# EAGLE board Board - Copy (EAGLE 8.4.2)
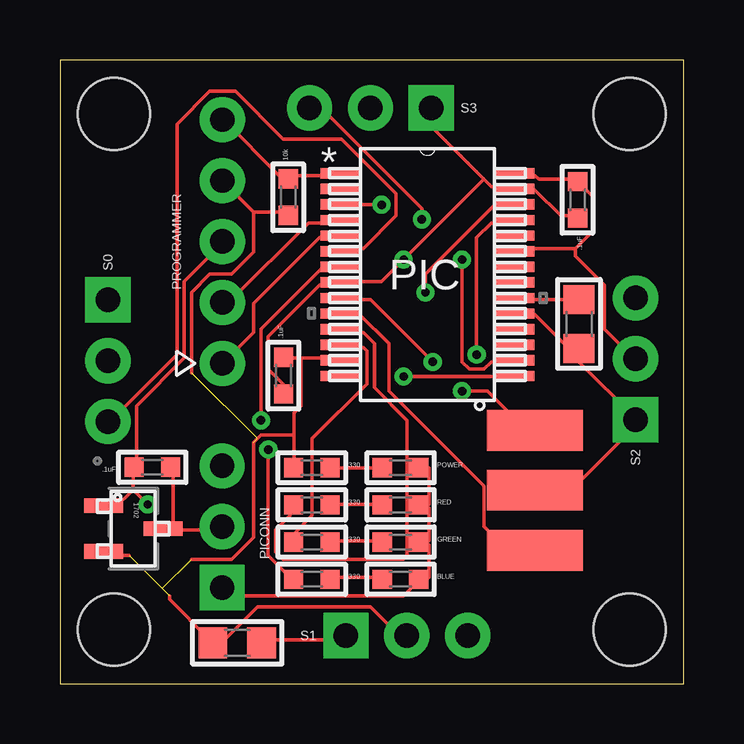
[diagram p0: board, top side]
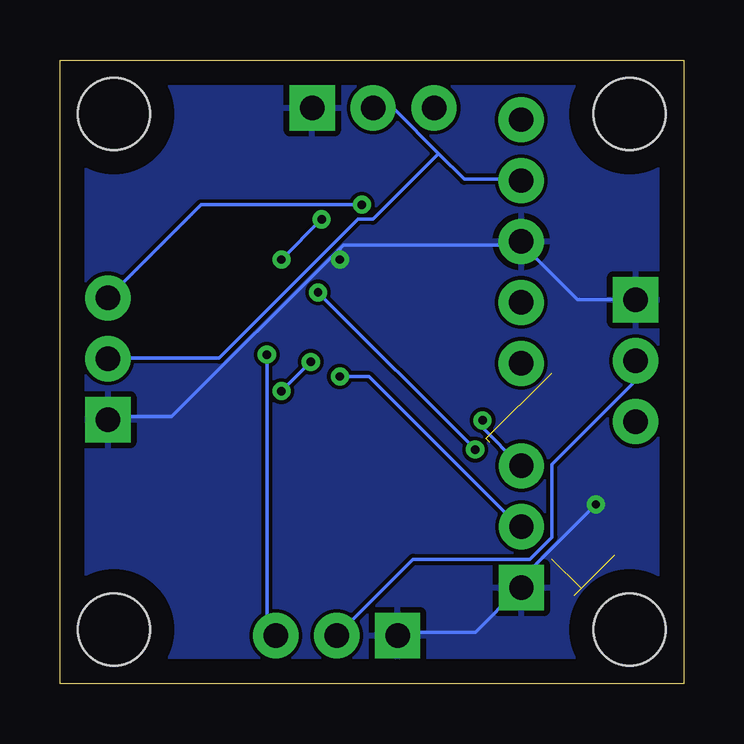
[diagram p1: board, bottom side, seen from below]

Size 26 x 26 mm. Coordinates in mm from the lower left corner, seen from the top.
Outline: 0,0 26,0 26,26 0,26 0,0
Copper layers (1*16): Top 0.035mm / dielectric 1.5mm / Bottom 0.035mm
Design rules "default": minimum track width 6mil, minimum drill 0.35mm, track to track 6mil, track to pad 6mil, pad to pad 6mil, via to via 6mil, smd to smd 6mil, copper to edge 40mil, drill to drill 6mil, minimum pad ring 10mil, minimum via ring 8mil, stop-mask expansion 4mil, vias tented up to drill 0mil, thermal gap 10mil
Holes 3 mm at 2.25,23.75 23.75,23.75 23.75,2.25 2.25,2.25

## Footprints (pad centres in the part's own frame; a part is rotated, then mirrored left to right if it is on the bottom)
REGULATOR3P = smd 0.61 x 1.626: 1 -0.95,-1.245; 2 0.95,-1.245; 3 0,1.245
L0603 = smd 0.8 x 0.8: 1 -0.762,0; 2 0.762,0
C0603 = smd 0.8 x 0.8: 1 -0.762,0; 2 0.762,0
C0805 = smd 1.2 x 1.3: 1 -1.016,0; 2 1.016,0
PIC32SSOP = smd 1.676 x 0.432: 1 -3.617,4.225; 2 -3.617,3.575; 3 -3.617,2.925; 4 -3.617,2.275; 5 -3.617,1.625; 6 -3.617,0.975; 7 -3.617,0.325; 8 -3.617,-0.325; 9 -3.617,-0.975; 10 -3.617,-1.625; 11 -3.617,-2.275; 12 -3.617,-2.925; 13 -3.617,-3.575; 14 -3.617,-4.225; 15 3.617,-4.225; 16 3.617,-3.575; 17 3.617,-2.925; 18 3.617,-2.275; 19 3.617,-1.625; 20 3.617,-0.975; 21 3.617,-0.325; 22 3.617,0.325; 23 3.617,0.975; 24 3.617,1.625; 25 3.617,2.275; 26 3.617,2.925; 27 3.617,3.575; 28 3.617,4.225
PICONN = drill 1.016 pad 1.88: +5 2.54,0; TX 5.08,0 | drill 1.016 pad 1.88 square: GND 0,0
PROGRAMMER5P = drill 1.016 pad 1.88: 1 0,0; 2 2.54,0; 3 5.08,0; 4 7.62,0; 5 10.16,0
R0603 = smd 0.8 x 0.8: 1 -0.762,0; 2 0.762,0
OSC = smd 1.7 x 4: 1 -2.497,-0.499; 2 -0.012,-0.501; 3 2.499,-0.508
VIVE = drill 1.016 pad 1.88: +3.3 2.54,0; S 5.08,0 | drill 1.016 pad 1.88 square: GND 0,0

## Placement (x,y rotation side)
1702  REGULATOR  [REGULATOR3P]  3.06,6.46 270 top
BLUE  BLUE  [L0603]  14.2,4.35 0 top
CAP1  .1uF  [C0603]  3.85,9.02 180 top
CAP2  10uF  [C0805]  7.39,1.7 0 top
CAP3  .1uF  [C0603]  9.32,12.84 90 top
CAP4  10uF  [C0805]  21.64,14.99 270 top
CAP5  .1uF  [C0603]  21.58,20.17 270 top
GREEN  GREEN  [L0603]  14.2,5.9 0 top
PIC  PIC32-MX250F128BSSOP  [PIC32SSOP]  15.32,17.05 0 top
PICONN  PICONN  [PICONN]  6.76,4 90 top
POWER  POWER  [L0603]  14.2,9 0 top
PROGRAMMER  PROGRAMMER  [PROGRAMMER5P]  6.77,13.35 90 top
RED  RED  [L0603]  14.2,7.45 0 top
RES1  330  [R0603]  10.5,9 0 top
RES2  10k  [R0603]  9.52,20.28 90 top
RES3  330  [R0603]  10.5,7.45 0 top
RES4  330  [R0603]  10.5,5.9 0 top
RES5  330  [R0603]  10.5,4.35 0 top
RESONATOR  8MHZ  [OSC]  20.3,8.05 270 top
S0  VIVE  [VIVE]  2,16 270 top
S1  VIVE  [VIVE]  11.92,2 0 top
S2  VIVE  [VIVE]  24,11 90 top
S3  VIVE  [VIVE]  15.48,24 180 top

## Library data of the parts
1702 BLUE CAP1-CAP5 GREEN PIC PICONN POWER PROGRAMMER RED RES1-RES5 RESONATOR S0 S1-S3 = 433

## Nets
+3.3: 1702.2 CAP2.1 CAP3.2 CAP5.1 PIC.13 PIC.23 PIC.28 PROGRAMMER.4 RES1.1 RES2.1 S0.+3.3 S1.+3.3 S2.+3.3 S3.+3.3
+5: 1702.3 CAP1.1 PIC.15 PICONN.+5
GND: 1702.1 BLUE.2 CAP1.2 CAP2.2 CAP3.1 CAP4.2 CAP5.2 GREEN.2 PIC.8 PIC.19 PIC.27 PICONN.GND POWER.2 PROGRAMMER.3 RED.2 RESONATOR.2 S0.GND S1.GND S2.GND S3.GND
N$1: PIC.10 RESONATOR.3
N$2: PIC.9 RESONATOR.1
N$3: POWER.1 RES1.2
N$4: PIC.4 PROGRAMMER.2
N$5: CAP4.1 PIC.20
N$6: PIC.12 RES4.1
N$7: PIC.1 PROGRAMMER.5 RES2.2
N$8: PIC.11 RES3.1
N$9: PIC.5 PROGRAMMER.1
N$11: BLUE.1 RES5.2
RA1: PIC.3 S2.S
RA4: GREEN.1 RES4.2
RB2: PIC.6 S0.S
RB4: RED.1 RES3.2
RB7: PIC.16 S3.S
RB14: PIC.25 S1.S
RB15: PIC.26 RES5.1
TX: PIC.7 PICONN.TX

## Tracks (layer width: path | path; a pad name or v marks a point on that pad's centre or on a via)
+3.3  (5 unrouted)
  Top 0.152: PIC.28 19.05,21.18 19.81,21.18 19.96,21.03 21.49,21.03 CAP5.1 21.64,20.88 22.25,20.27 22.25,18.9 21.49,18.14 | 21.49,18.14 19.05,18.14 PIC.23 | 21.49,18.14 21.49,17.83 22.71,16.61 22.71,14.78 23.93,13.56 S2.+3.3 | 8.08,19.66 9.45,19.66 RES2.1 | 8.08,19.66 6.86,20.88 PROGRAMMER.4 | 10.06,13.56 11.58,13.56 PIC.13 | 10.06,13.56 9.45,13.56 CAP3.2 | 9.75,10.36 9.75,11.28 10.06,11.58 10.06,13.56 | 9.75,10.36 9.75,9.14 RES1.1 | 4.57,3.66 4.57,3.5 6.25,1.83 CAP2.1 6.4,1.83 6.86,1.83 8.23,3.2 12.95,3.2 14.02,2.13 14.33,2.13 S1.+3.3 | 2.9,5.33 2.29,5.33 1702.2 | 9.75,10.36 8.38,10.36 8.08,10.06 8.08,6.1 7.16,5.18 5.49,5.18 | 8.08,19.66 8.08,17.98 7.16,17.07 6.25,17.07 5.49,16.31 5.49,12.95
  Bottom 0.152: S0.+3.3 2.13,13.41 2.13,12.5 5.49,9.14 5.49,6.1 6.4,5.18 11.28,5.18 14.33,2.13 S1.+3.3 | 10.21,22.1 9.14,21.03 6.86,21.03 PROGRAMMER.4 | 10.21,22.1 12.04,23.93 12.8,23.93 S3.+3.3 | 10.21,22.1 12.95,19.36 13.56,19.36 19.36,13.56 23.93,13.56 S2.+3.3
+5  (via drill 0.35)
  Top 0.152: 4.72,6.4 4.72,8.99 CAP1.1 | v14.33,12.8 18.9,12.8 PIC.15 | 4.72,6.4 6.71,6.4 PICONN.+5 | 4.72,6.4 1702.3
  Bottom 0.152: v14.33,12.8 13.11,12.8 6.86,6.55 PICONN.+5
GND  (via drill 0.35)
  Top 0.152: CAP3.1 9.3,12.19 9.3,12.5 8.69,13.11 8.69,14.48 10.82,16.61 11.58,16.61 PIC.8 11.73,16.76 13.41,16.76 v14.33,17.68 17.68,21.03 | CAP5.2 21.49,19.51 20.88,19.51 19.81,20.57 19.05,20.57 PIC.27 18.9,20.73 17.98,20.73 17.68,21.03 | 17.68,21.03 15.54,23.16 15.54,23.93 S3.GND | CAP2.2 8.53,1.83 11.73,1.83 11.89,1.98 S1.GND | POWER.2 15.39,8.99 15.39,7.47 RED.2 15.39,7.32 15.39,5.94 GREEN.2 15.39,5.79 15.39,4.42 BLUE.2 15.24,4.27 14.94,4.27 14.33,3.66 7.16,3.66 6.86,3.96 PICONN.GND | PIC.19 19.05,15.39 19.81,15.39 21.18,14.02 21.49,14.02 CAP4.2 21.64,13.87 21.64,13.41 23.93,11.12 S2.GND 23.93,10.97 23.93,10.67 20.73,7.47 20.12,7.47 RESONATOR.2 | 3.05,8.08 3.05,8.99 CAP1.2 3.2,9.14 3.2,11.58 5.18,13.56 5.18,16.76 6.71,18.29 PROGRAMMER.3 | 3.05,8.08 2.29,7.32 1702.1 | 3.05,8.08 v3.66,7.47
  Bottom 0.152: S1.GND 11.89,2.13 8.69,2.13 6.86,3.96 PICONN.GND 6.71,4.12 6.71,4.42 v3.66,7.47 | S0.GND 2.13,16 4.42,16 6.71,18.29 PROGRAMMER.3 6.86,18.29 14.17,18.29 14.33,18.14 | 14.33,18.14 21.34,11.12 23.93,11.12 S2.GND | 14.33,18.14 v14.33,17.68
  pour Bottom: 0,26 0,0 26,0 26,26
N$1
  Top 0.152: PIC.10 11.73,15.39 12.5,15.39 13.72,14.17 13.72,12.19 17.68,8.23 17.68,6.55 19.2,5.03 19.96,5.03 RESONATOR.3
N$2  (via drill 0.35)
  Top 0.152: v15.54,13.41 12.95,16 11.73,16 PIC.9 | v16.76,12.19 17.83,12.19 19.96,10.06 RESONATOR.1
  Bottom 0.152: v16.76,12.19 v15.54,13.41
N$3
  Top 0.152: RES1.2 11.28,8.99 13.72,8.99 POWER.1
N$4
  Top 0.152: PIC.4 11.58,19.2 10.36,19.2 7.16,16 6.86,16 PROGRAMMER.2
N$5
  Top 0.152: CAP4.1 21.49,16 19.05,16 PIC.20
N$6
  Top 0.152: RES4.1 9.75,5.94 9.75,6.25 10.52,7.01 10.52,10.21 12.8,12.5 12.8,13.87 12.65,14.02 11.73,14.02 PIC.12
N$7
  Top 0.152: PIC.1 11.58,21.18 9.6,21.18 RES2.2 9.45,21.18 9.14,21.18 6.86,23.47 PROGRAMMER.5
N$8
  Top 0.152: RES3.1 9.6,7.32 9.6,7.01 8.99,6.4 8.99,5.49 9.3,5.18 14.33,5.18 14.48,5.33 14.48,10.97 13.11,12.34 13.11,14.17 12.65,14.63 11.73,14.63 PIC.11
N$9
  Top 0.152: PIC.5 11.58,18.59 10.82,18.59 8.08,15.85 8.08,14.63 6.86,13.41 PROGRAMMER.1
N$11
  Top 0.152: RES5.2 11.28,4.42 13.72,4.42 BLUE.1
RA1  (via drill 0.35)
  Top 0.152: v13.41,19.96 11.73,19.96 PIC.3
  Bottom 0.152: v13.41,19.96 20.12,19.96 23.93,16.15 S2.S
RA4
  Top 0.152: RES4.2 11.28,5.94 13.72,5.94 GREEN.1
RB2
  Top 0.152: PIC.6 11.73,18.14 12.65,18.14 14.02,19.51 14.02,20.42 11.73,22.71 9.3,22.71 7.32,24.69 6.25,24.69 4.88,23.32 4.88,13.72 2.13,10.97 S0.S
RB4
  Top 0.152: RES3.2 11.28,7.47 13.72,7.47 RED.1
RB7  (via drill 0.35)
  Top 0.152: v16.76,17.68 16.76,13.41 17.07,13.11 17.68,13.11 17.98,13.41 18.9,13.41 PIC.16 | v15.09,19.36 15.09,19.81 10.97,23.93 10.52,23.93 S3.S
  Bottom 0.152: v15.09,19.36 v16.76,17.68
RB14  (via drill 0.35)
  Top 0.152: v17.37,13.72 17.37,18.59 17.98,19.2 18.9,19.2 PIC.25
  Bottom 0.152: v17.37,13.72 17.37,2.44 17.07,2.13 S1.S
RB15  (via drill 0.35)
  Top 0.152: v8.69,9.75 8.69,5.33 9.6,4.42 RES5.1 | v15.24,16.31 15.24,17.07 18.14,19.96 18.9,19.96 PIC.26
  Bottom 0.152: v15.24,16.31 v8.69,9.75
TX  (via drill 0.35)
  Top 0.152: v8.38,10.97 8.38,14.78 10.97,17.37 11.58,17.37 PIC.7
  Bottom 0.152: v8.38,10.97 8.38,10.67 6.86,9.14 PICONN.TX